# Altium PCB BAD.PcbDoc (part 1 of 2)
Units mil, origin at the board's own origin, x right, y up, seen from the top; angles counter-clockwise.
Board outline 1811.02 x 1811.02 mil, 4 copper layers (Top Layer, Int1 (GND), Int2, Bottom Layer), stack 53.912 mil thick; 65 components, 61 nets, 262 pads, 174 vias.
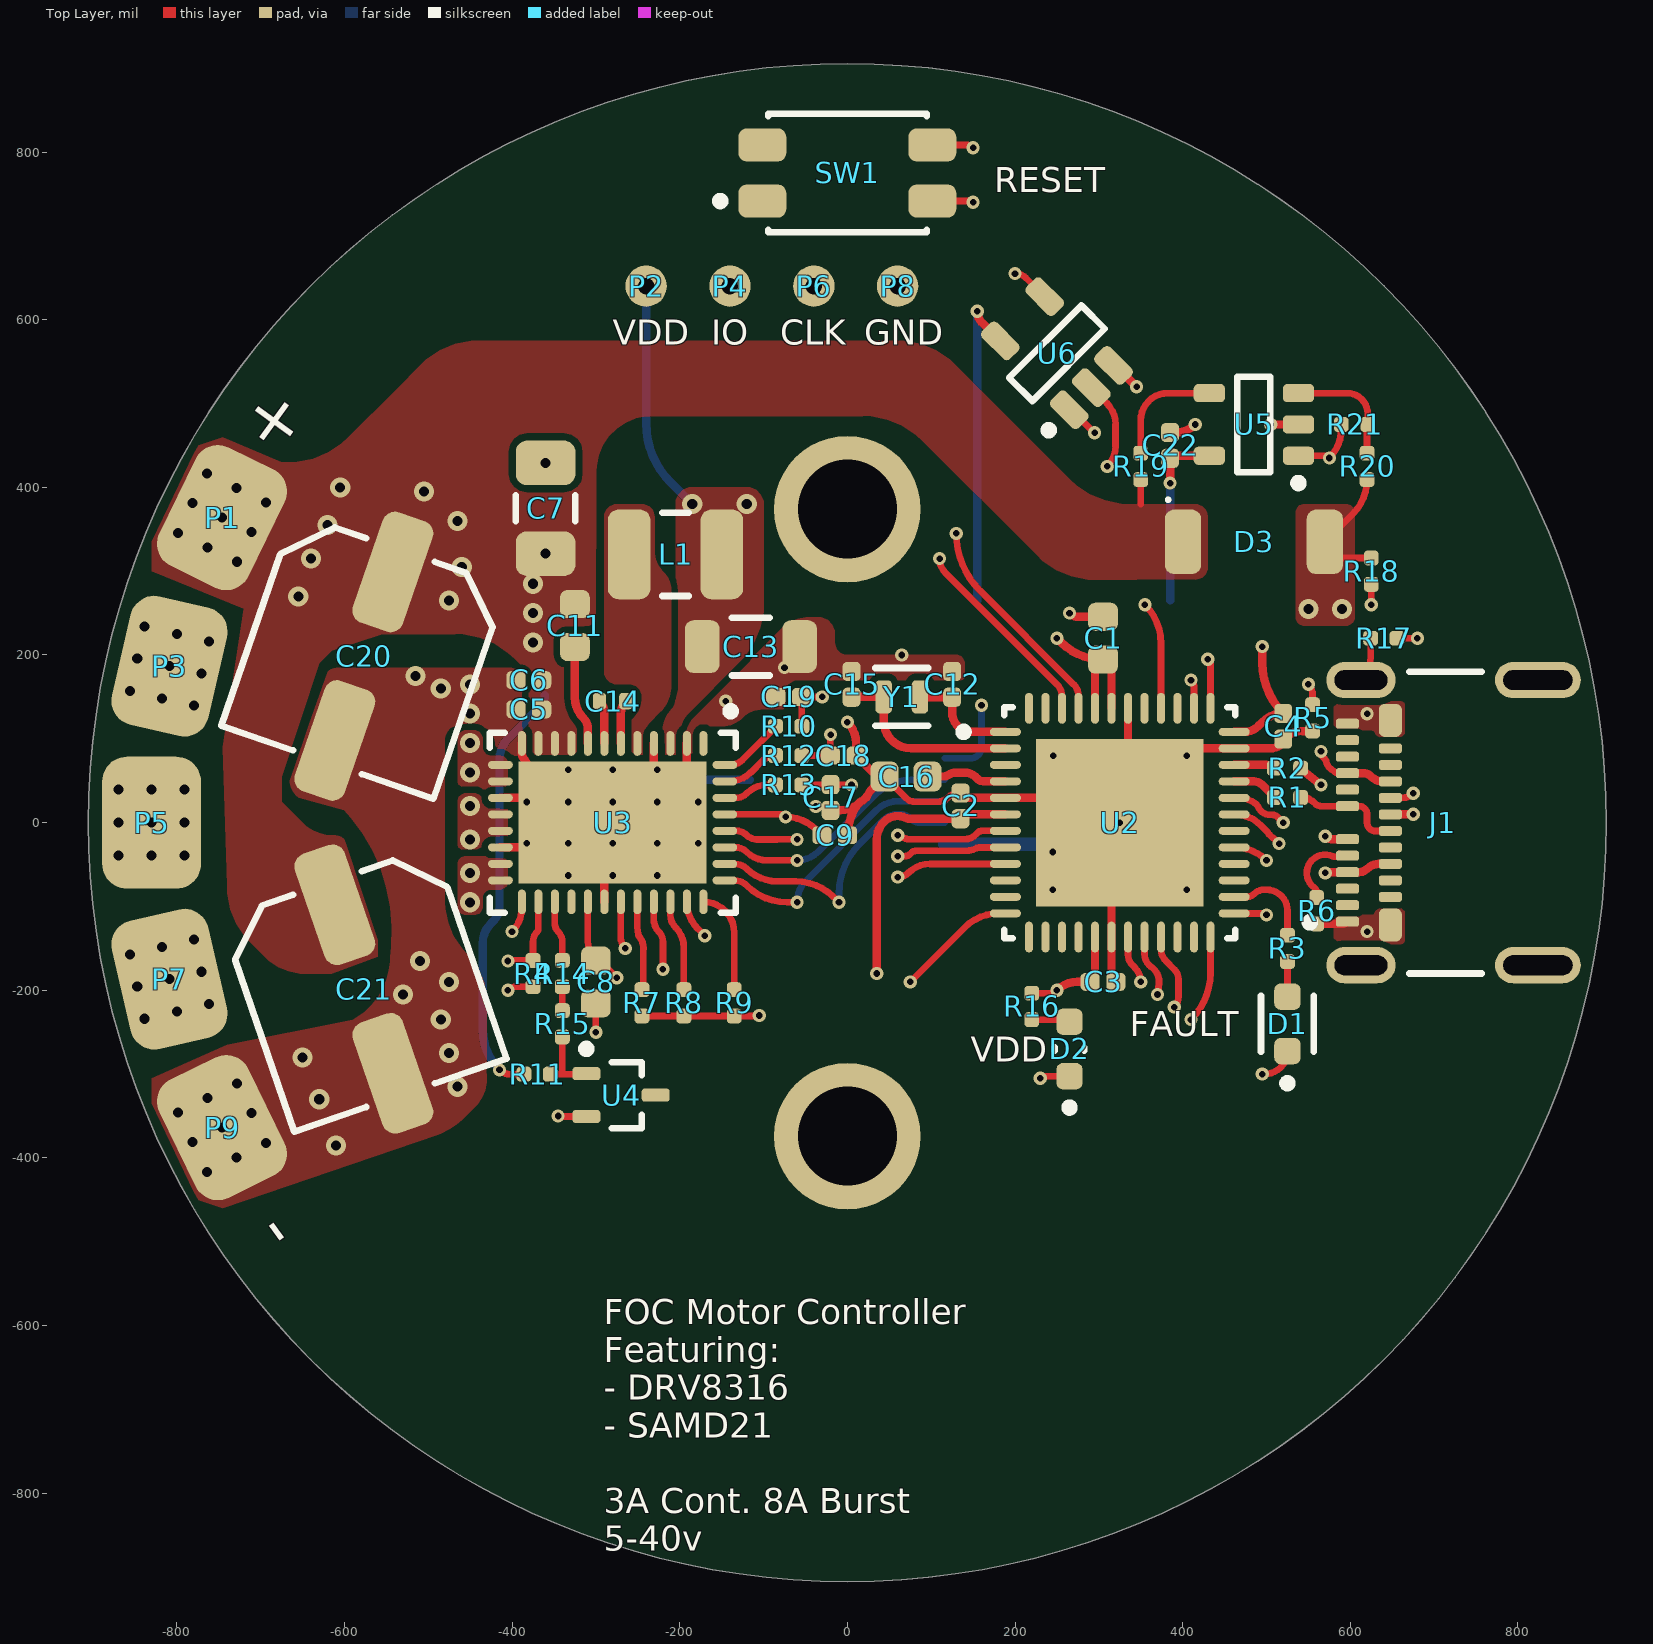
[diagram p0: Top Layer view]
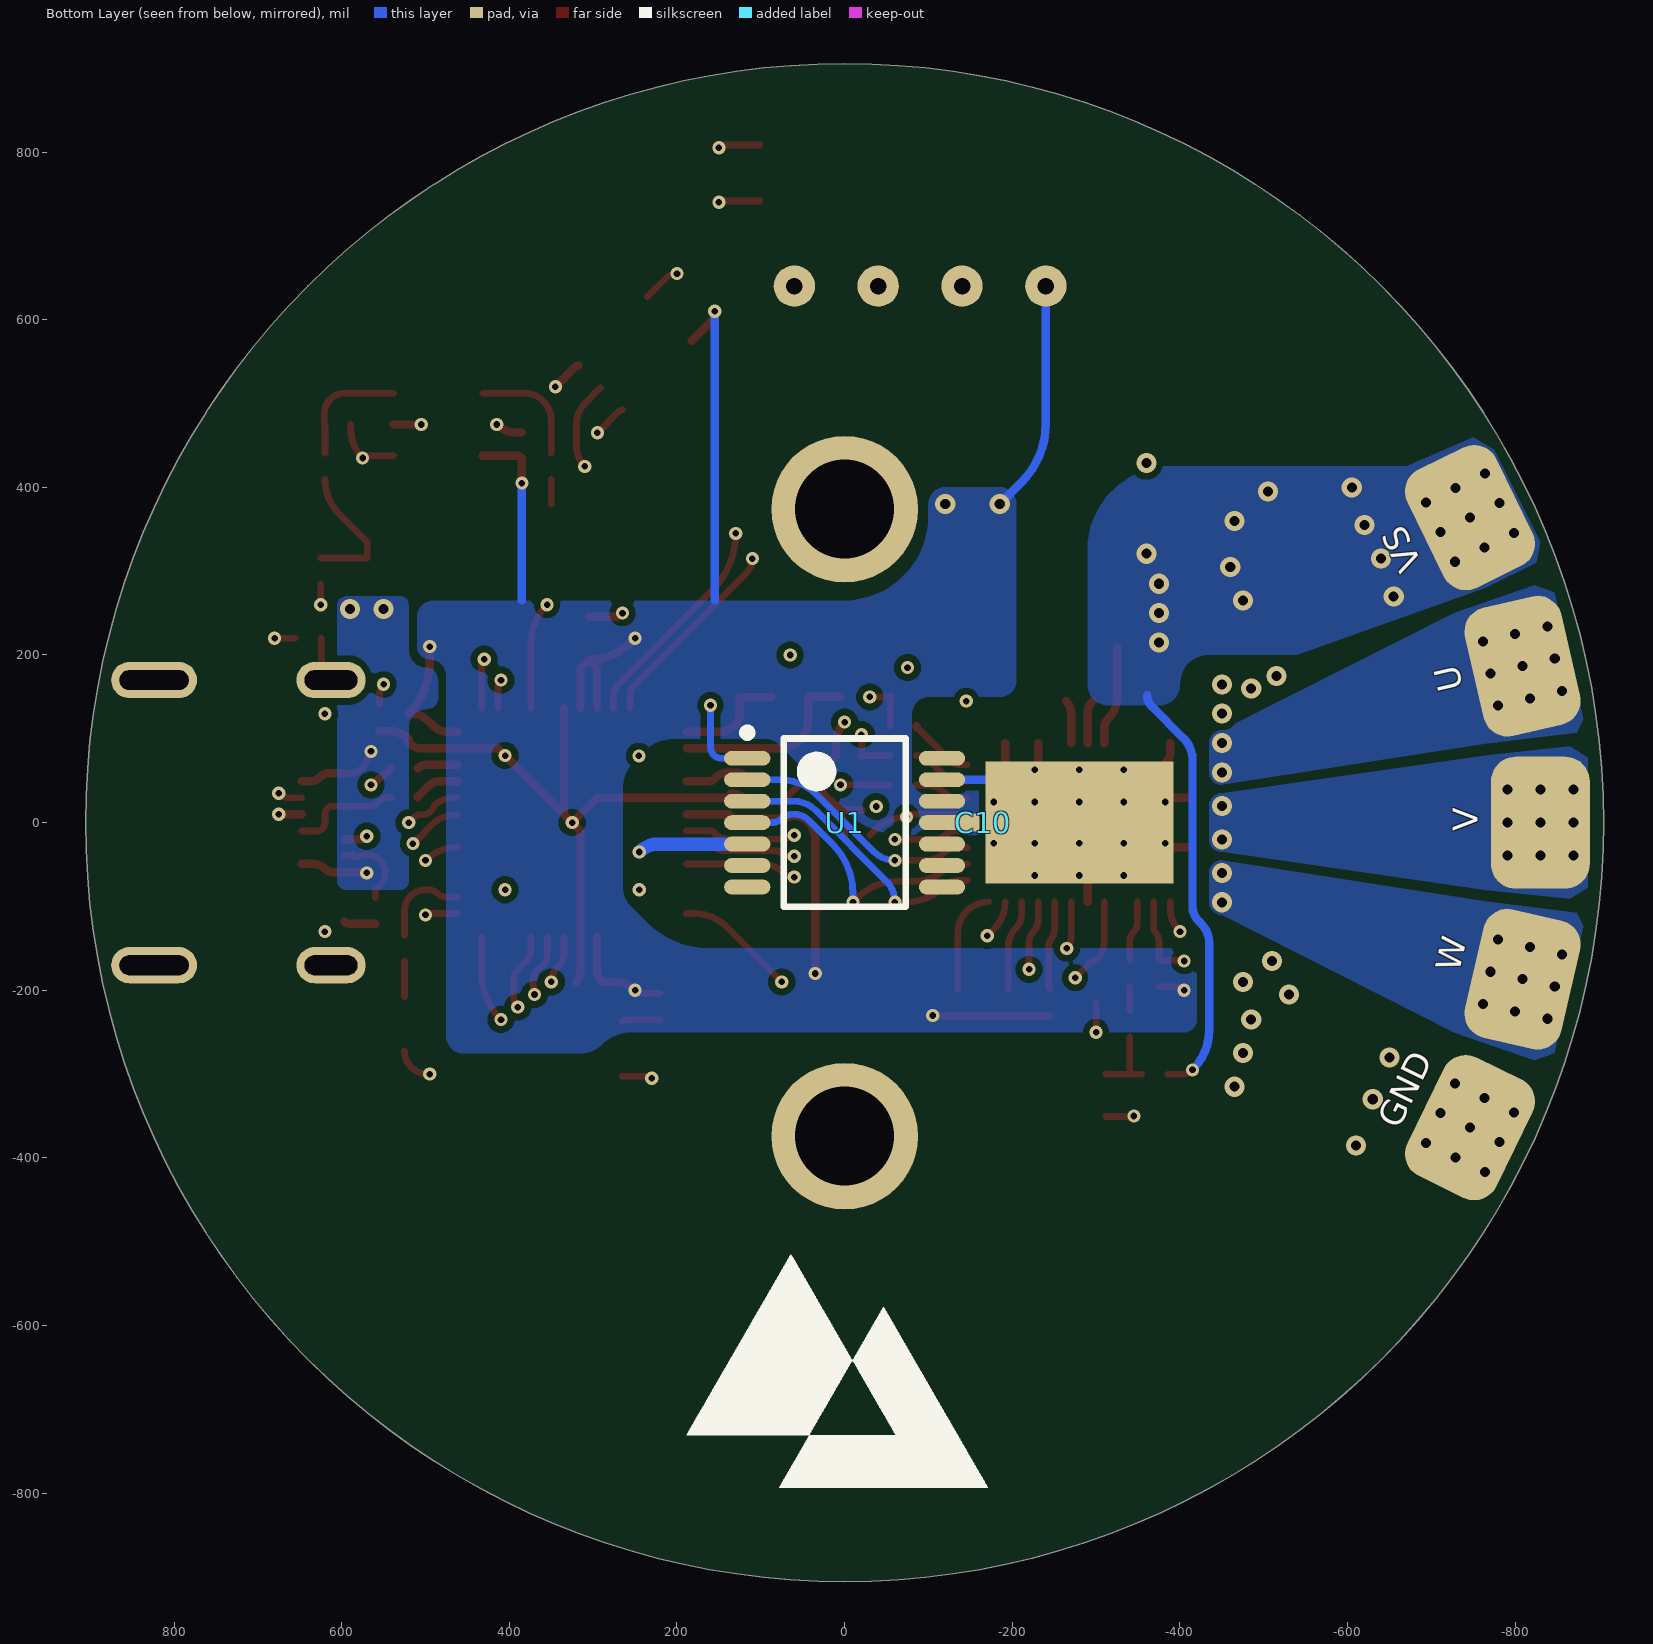
[diagram p1: Bottom Layer view, seen from below]
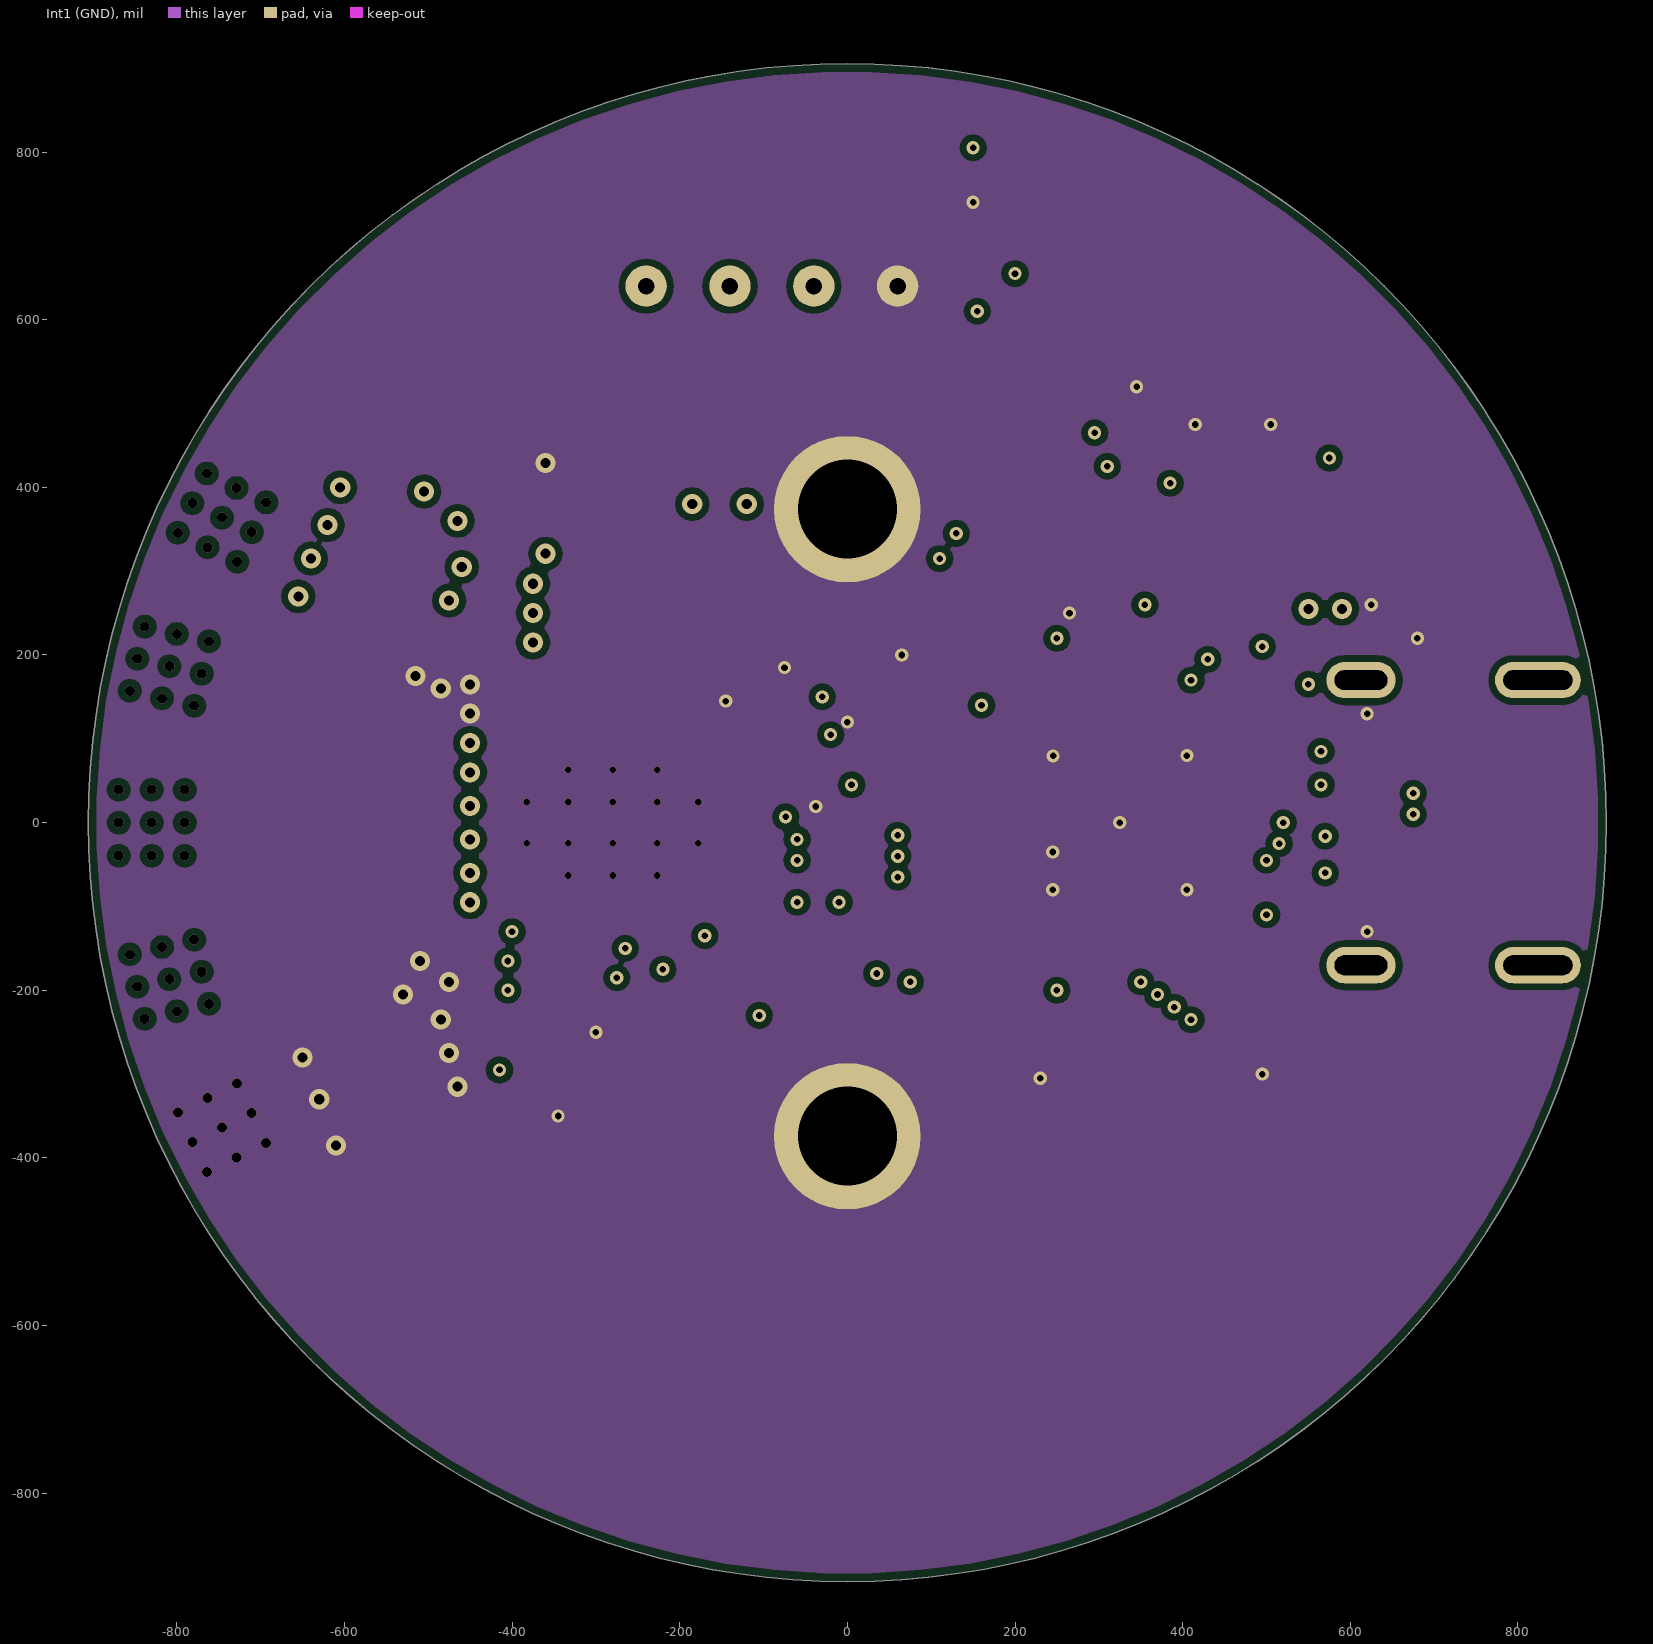
[diagram p2: Int1 (GND)]
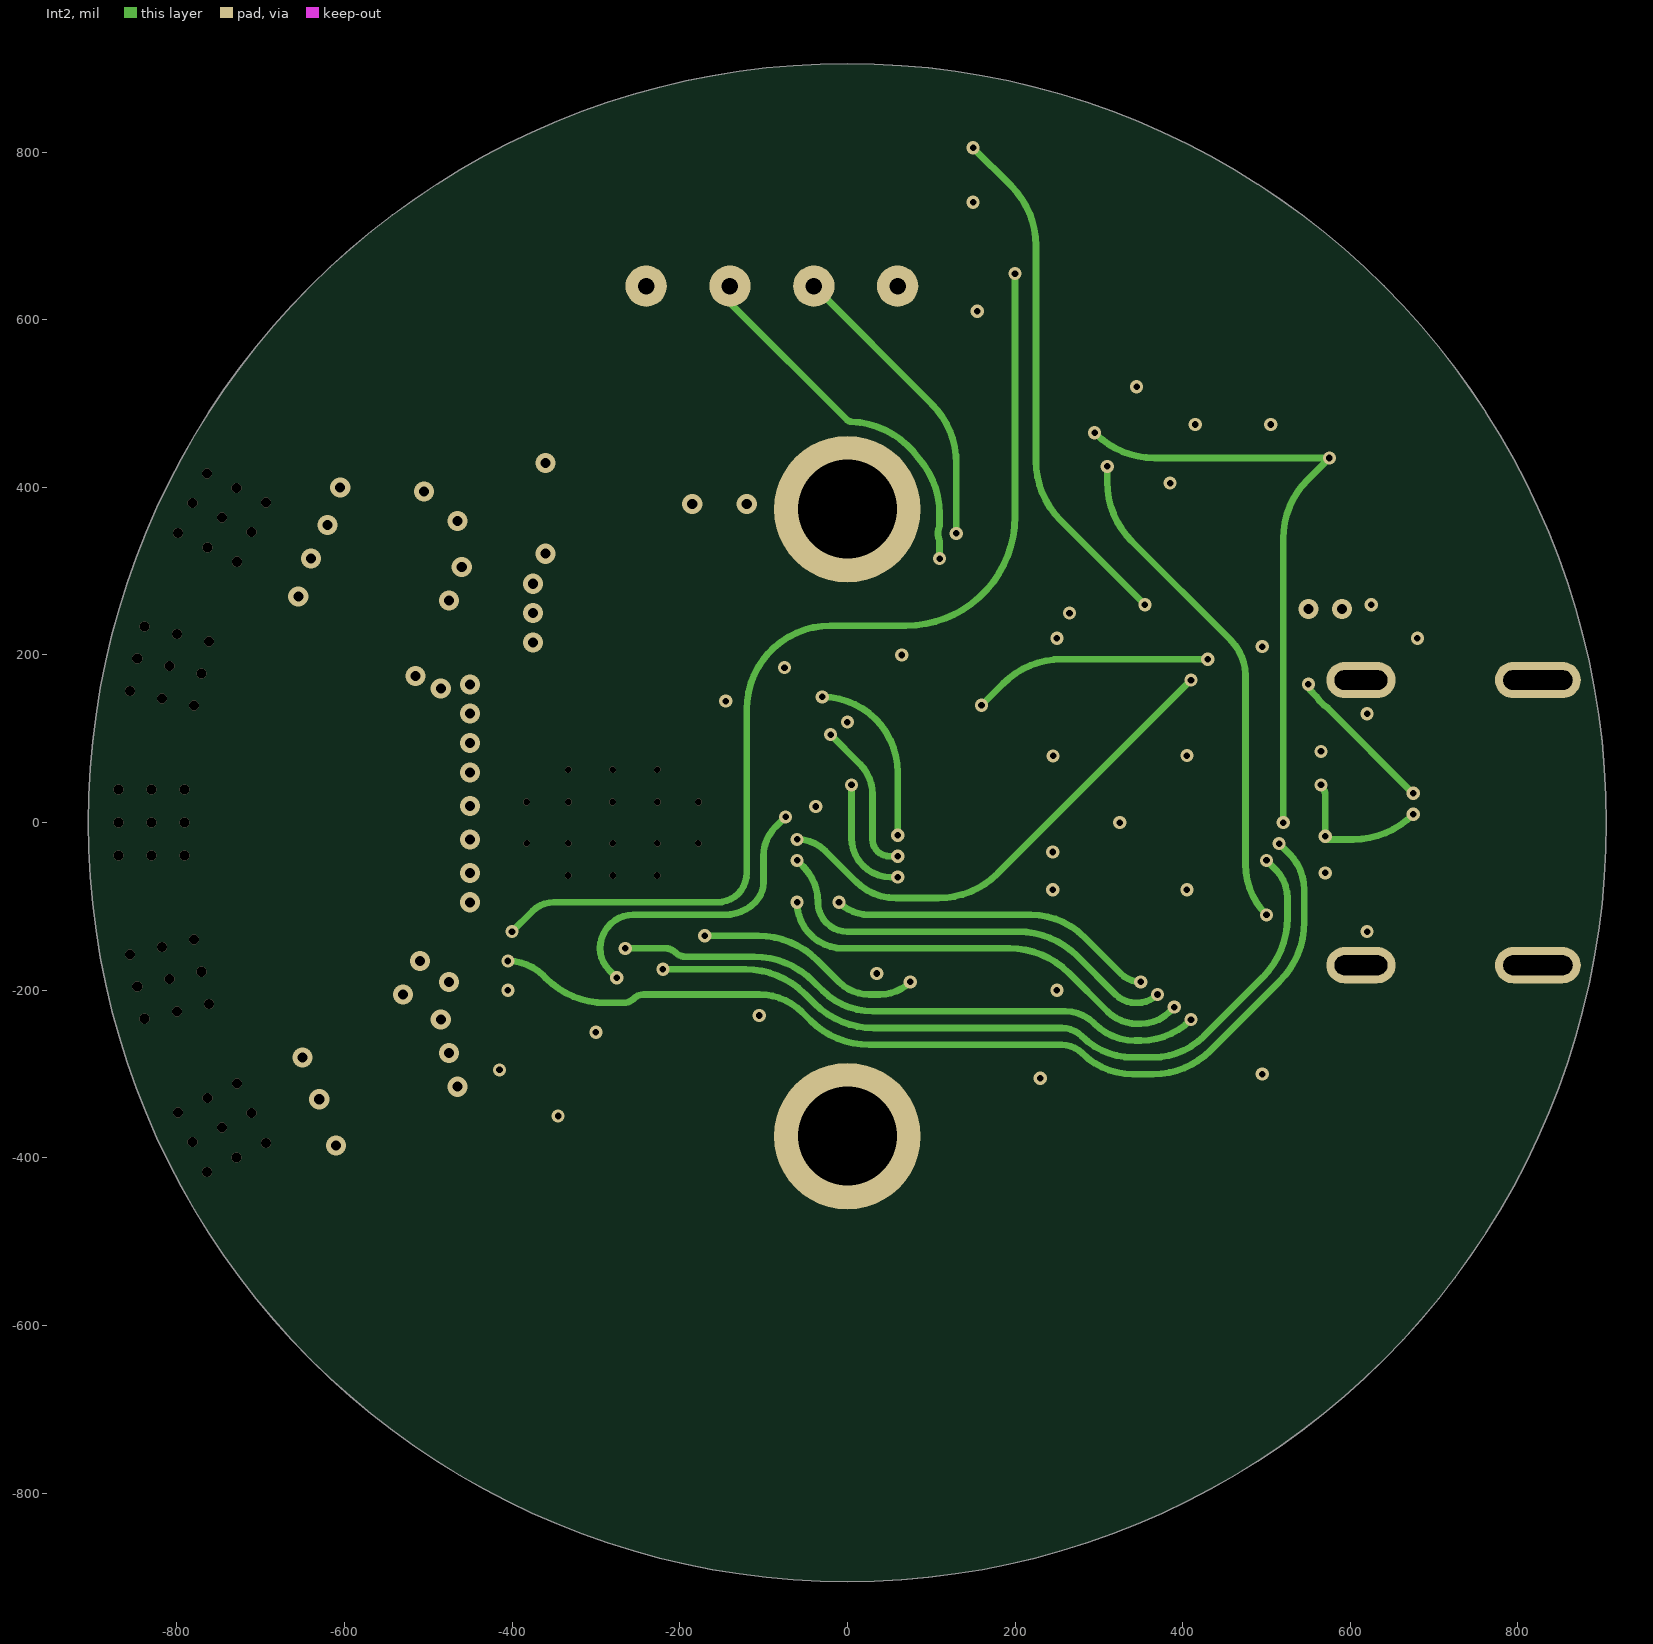
[diagram p3: Int2]
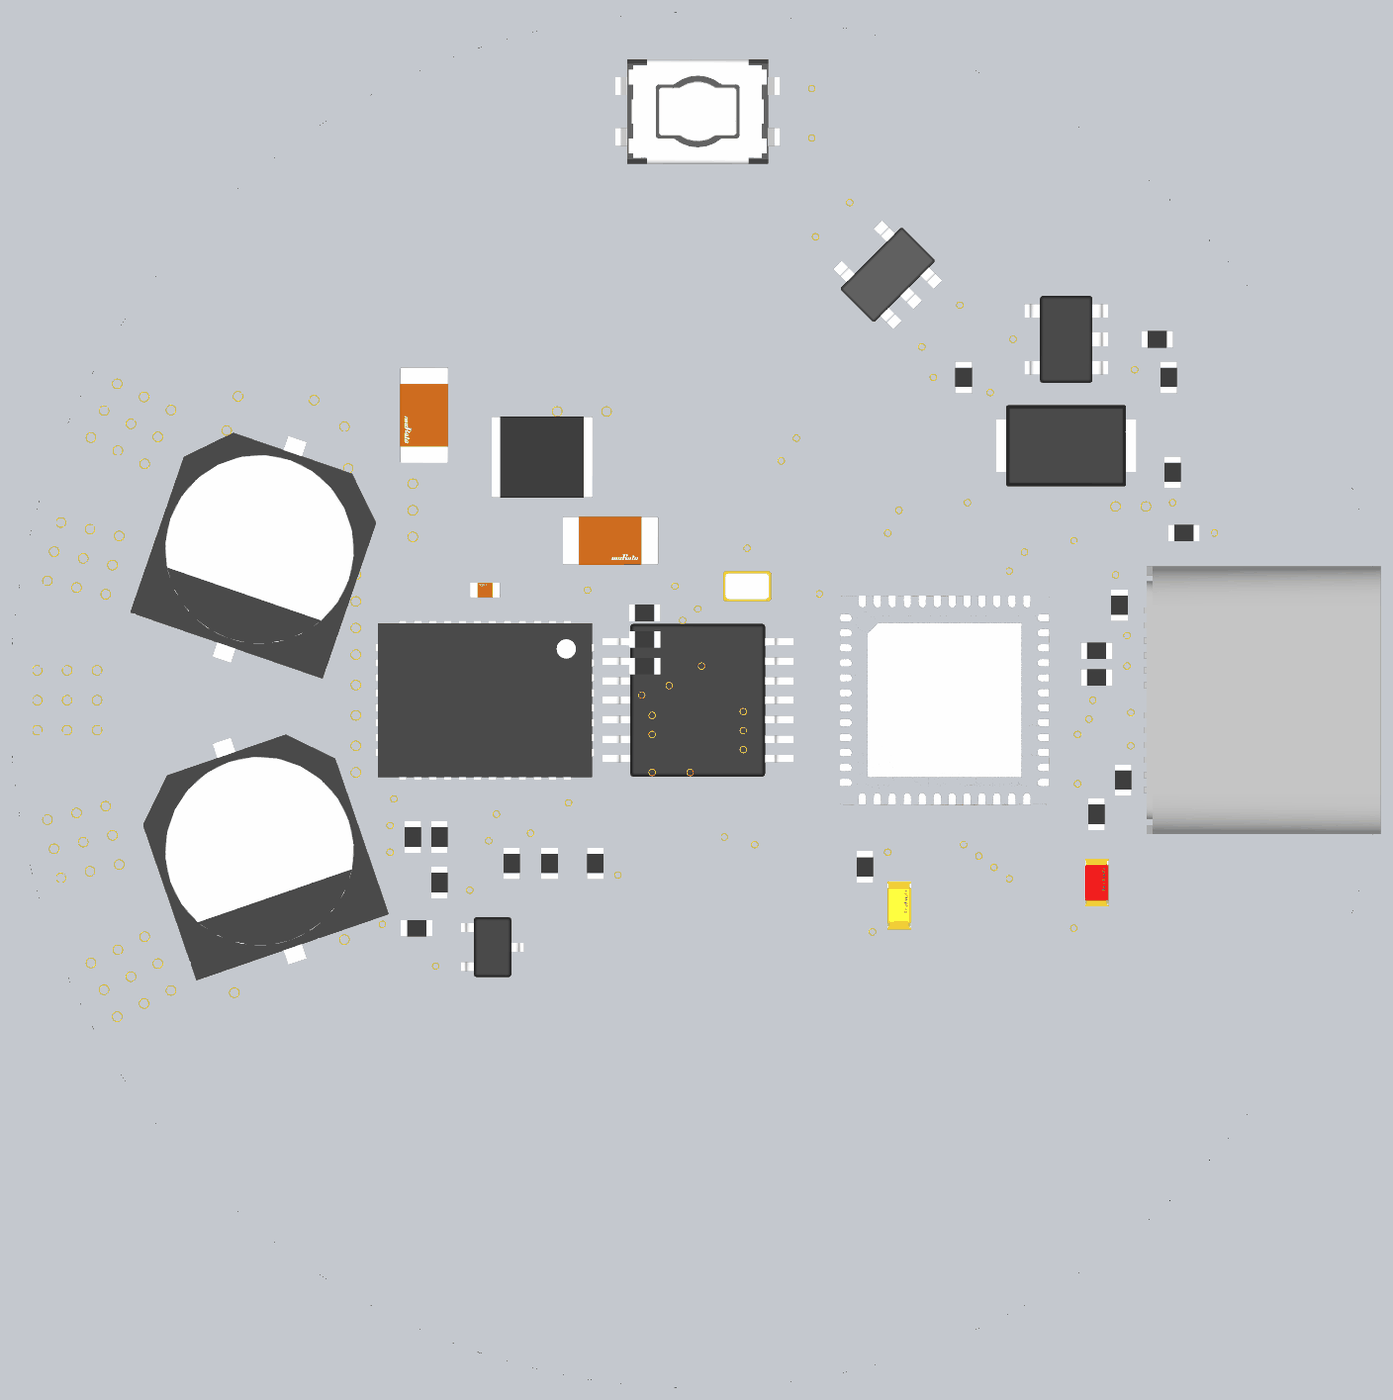
[diagram p5: 3D render of the assembled board from above, using the file's embedded part models]

## Layer stack, top to bottom
Top Solder: solder mask 1, SM-001, Dk 4
Top Layer: signal copper 1.378
Dielectric 1: prepreg 5.1, PP-017, Dk 4.3
Dielectric 2: prepreg 5.1, PP-017, Dk 4.3
Int1 (GND): signal copper 1.378
Dielectric 3: core 28, Core-039, Dk 4.8
Int2: signal copper 1.378
Dielectric 4: prepreg 5.1, PP-017, Dk 4.3
Dielectric 5: prepreg 5.1, PP-017, Dk 4.3
Bottom Layer: signal copper 1.378
Bottom Solder: solder mask 1, SM-001, Dk 4

## Board outline
-905.51,0 ccw(c0,0) 0,-905.51 ccw(c0,0) 905.51,0 ccw(c0,0) 0,905.51 ccw(c0,0)

## Design rules (kind name [scope] priority, off if disabled: settings)
BoardOutlineClearance [All] p1: gap=10 ignorepadtopadclearanceinfootprint=FALSE except(0: Arc-SplitContinuation Track-SplitContinuation SMDPad-SplitContinuation THPad-SplitContinuation Via-SplitContinuation Fill-SplitContinuation Poly-SplitContinuation Region-SplitContinuation Text-SplitContinuation)
Clearance [All] p1: gap=8 ignorepadtopadclearanceinfootprint=TRUE except(5: Arc-Arc Arc-Track Track-Track SMDPad-SMDPad; 7.87: Arc-SMDPad Track-SMDPad; 10: Arc-Via Track-Via; 12.99: Arc-THPad Track-THPad)
DiffPairsRouting [All] p1: maxlimit=10 minlimit=8 mostfreqgap=10 toplayer_minwidth=8 toplayer_maxwidth=16 toplayer_prefwidth=10 midlayer1_mingap=10 midlayer1_minwidth=15 midlayer1_maxwidth=15 midlayer1_prefwidth=15 midlayer2_mingap=10 midlayer2_minwidth=15 midlayer2_maxwidth=15 midlayer2_prefwidth=15 bottomlayer_minwidth=8 bottomlayer_maxwidth=16 bottomlayer_prefwidth=10 maxuncoupledlength=500
HoleSize [All] p1: absolutevalues=TRUE maxlimit=248 minlimit=8 maxpercent=80.000 minpercent=20.000
HoleToHoleClearance [All] p1: gap=20 allowstackedmicrovias=TRUE
MinimumAnnularRing [All] p1: minimumring=6
PolygonConnect [All] p1: connectstyle=Direct reliefconductorwidth=10 reliefentries=4 polygonreliefangle="90 Angle" airgapwidth=10
RoutingVias [All] p1: holewidth=28 width=50 viastyle="Through Hole" minholewidth=28 minwidth=50 maxholewidth=28 maxwidth=50
SilkToSolderMaskClearance [IsPad] p1: minsilkscreentomaskgap=6 clearancetoexposedcopper=TRUE
SolderMaskExpansion [All] p1: expansion=3 istentingtop=FALSE
Width [All] p1: maxlimit=30 minlimit=5 preferedwidth=10 midlayer1_maxwidth=10 midlayer2_maxwidth=10 minimp=50.000000 maximp=50.000000 favimp=50.000000
26 further rules are at their usual default settings.

## Classes and differential pairs
differential pair USB: +USB_P -USB_N

## Components (designator, comment, footprint, x,y, rotation, side; value= is the part's Value field where it differs from the comment)
C1 "1uF" 0603CAP 305,220 r270 top
C2 "100nF" 0402CAP 135,20 r270 top
C3 "100nF" 0402CAP 305,-190 r180 top
C4 "100nF" 0402CAP 520,115 r90 top
C5 "100nF" 0402CAP -380,135 r0 top
C6 "100nF" 0402CAP -380,170 r0 top
C7 "10uF" FP-GRT31C-0_2-IPC_B -360,375 r270 top
C8 "1uF" 0603CAP -300,-190 r90 top
C9 "100nF" 0402CAP -15,-15 r180 top
C10 "100nF" 0402CAP -165,0 r0 bottom
C11 "1uF" 0603CAP -325,235 r90 top
C12 "22pF" 0402CAP 125,165 r270 top
C13 "22uF" FP-GRM319-0_15-MFG -115,210 r0 top
C14 "47nF" FP-GRM155-0_05-MFG -280,145 r180 top
C15 "22pF" 0402CAP 5,165 r270 top
C16 "1uF" 0603CAP 70,55 r0 top
C17 "22pF" 0402CAP -20,30 r90 top
C18 "22pF" 0402CAP -5,80 r180 top
C19 "22pF" 0402CAP -70,150 r0 top
C20 "47 uF" CAPAE7866X61N -576.77,198.6 r251 top locked
C21 "47 uF" CAPAE7866X61N -576.77,-198.6 r289 top locked
C22 "100nF" 0402CAP 385,450 r270 top
D1 "Red" FP-APT1608LSECK-J3-PRV-MFG 525,-240 r90 top
D2 "Green" FP-APT1608MGC-MFG 265,-270 r90 top
D3 "PMEG40T20EPX" SODFL470X110-2N 485,335 r0 top
J1 "USB C" FP-1054500101-MFG 745,0 r90 top locked
L1 "47uH" INDC3225X25N -205,320 r180 top
P1 "Power Pad" "Power Pad" -746,363.85 r244 top
P2 "Small PTH Pad" "Small PTH Pad" -240,640 r0 top
P3 "Power Pad" "Power Pad" -808.73,186.71 r257 top
P4 "Small PTH Pad" "Small PTH Pad" -140,640 r0 top
P5 "Power Pad" "Power Pad" -830,0 r270 top
P6 "Small PTH Pad" "Small PTH Pad" -40,640 r0 top
P7 "Power Pad" "Power Pad" -808.73,-186.71 r283 top
P8 "Small PTH Pad" "Small PTH Pad" 60,640 r0 top
P9 "Power Pad" "Power Pad" -746,-363.85 r296 top
R1 "27" RESC1005X40X25LL05T05 525,30 r0 top
R2 "27" RESC1005X40X25LL05T05 525,65 r0 top
R3 "750" RESC1005X40X25LL05T05 525,-150 r270 top
R4 "5.1k" RESC1005X40X25LL05T05 -375,-180 r90 top
R5 "5.1k" RESC1005X40X25LL05T05 555,125 r270 top
R6 "5.1k" RESC1005X40X25LL05T05 560,-105 r270 top
R7 "5.1k" RESC1005X40X25LL05T05 -245,-215 r90 top
R8 "5.1k" RESC1005X40X25LL05T05 -195,-215 r90 top
R9 "5.1k" RESC1005X40X25LL05T05 -135,-215 r90 top
R10 "330" RESC1005X40X25LL05T05 -70,115 r0 top
R11 "2.7k" RESC1005X40X25LL05T05 -370,-300 r180 top
R12 "330" RESC1005X40X25LL05T05 -70,80 r0 top
R13 "330" RESC1005X40X25LL05T05 -70,45 r0 top
R14 "5.1k" RESC1005X40X25LL05T05 -340,-180 r270 top
R15 "5.1k" RESC1005X40X25LL05T05 -340,-240 r270 top
R16 "604" RESC1005X40X25LL05T05 220,-219.25 r90 top
R17 "100k" RESC1005X40X25LL05T05 640,220 r180 top
R18 "5.1k" RESC1005X40X25LL05T05 625,300 r90 top
R19 "5.1k" RESC1005X40X25LL05T05 350,425 r270 top
R20 "5.1k" RESC1005X40X25LL05T05 620,425 r270 top
R21 "100k" RESC1005X40X25LL05T05 605,475 r180 top
SW1 "EVQ-P2402M" EVQ-P2402M 0,775 r90 top
U1 "AS5047D-ATSM" TSOP65P640X120-14N 0,0 r180 bottom locked
U2 "ATSAMD21G18A-MF" QFN-48 325,0 r0 top locked
U3 "DRV8316" QFN50P500X700X100_HS-41L -280,0 r270 top locked
U4 "LM4040D33FTA" SOT65P210X100-3N -270,-325 r0 top
U5 "LT1716CS5#TRMPBF" SOT95P280X100-5N 485,475 r180 top
U6 "OR" DBV0005A_M 250,560 r135 top
Y1 "32.768 kHz" ABS05W-32.768KHZ-D-2-T 65,150 r0 top

## Footprints (in the part's own frame and the unit in brackets; to place one, negate y for a bottom-side part, rotate by r counter-clockwise, add the part's x,y. Pads: shape width x height; smd on the part's side, far side on the other; paste and mask are expansions set on the pad)
0402CAP [mm] "0402 Capacitor"
  rrect50% 0.58x0.54 smd: 1(-0.39,0) 2(0.39,0)
  body extent -0.55,-0.3 0.55,0.3, height 0.56
0603CAP [mm] "0603 Capacitor"
  rrect50% 0.85x0.9 smd: 1(-0.65,0) 2(0.65,0)
  body extent -0.88,-0.48 0.87,0.48, height 0.9
ABS05W-32.768KHZ-D-2-T [mm]
  rrect50% 0.5x1 smd paste+0: 1(-0.55,0) 2(0.55,0)
  silkscreen extent -0.8,-0.87 0.8,0.87, body extent -0.95,-0.65 0.95,0.65, height 0.25
CAPAE7866X61N [mm] "Aluminum Electrolytic Capacitor, Body 6.60x6.60x6.10mm, IPC Medium Density"
  rrect50% 3.55x1.6 smd: 1(-2.7,0) 2(2.7,0)
  silkscreen extent -3.4,-3.4 3.4,3.4, body extent -3.9,-3.4 3.9,3.4, height 6.1
DBV0005A_M [mm] "SOT23, 5-Leads, Body 3.05x1.75mm, Pitch 0.95mm, IPC Low Density"
  rrect50% 1.2x0.65 smd: 1(-1.475,0.95) 2(-1.475,0) 3(-1.475,-0.95) 4(1.475,-0.95) 5(1.475,0.95)
  silkscreen extent -1.6,-1.55 0.5,1.95, body extent -1.42,-1.46 1.42,1.46, height 1.08
EVQ-P2402M [mm] "Tactile Switch"
  rrect50% 1x1.45 smd paste+0: 1(-0.85,2.575) 2(0.85,2.575) 3(-0.85,-2.575) 4(0.85,-2.575)
  silkscreen extent -1.8,-2.4 1.8,3.97, body extent -1.9,-3.4 1.9,3.4, height 0.25
FP-1054500101-MFG [mm]
  rrect100% 1.1x2.1 hole 1.6 slot 0.6 at 0 deg paste-1000 mask+0: 1(-4.32,3.36) 2(4.32,3.36)
  rrect100% 1.1x2.6 hole 2.1 slot 0.6 at 0 deg paste-1000 mask+0: 3(-4.32,-2) 4(4.32,-2)
  rrect50% 0.3x0.7 smd paste-0.05 mask+0: A1(-3,3.77) A2(-2.5,3.77) A3(-2,3.77) A4(-1.5,3.77) A5(-1,3.77) A6(-0.5,3.77) A7(0.5,3.77) A8(1,3.77) A9(1.5,3.77) A10(2,3.77) A11(2.5,3.77) A12(3,3.77) B2(2.25,2.47) B3(1.75,2.47) B4(1.25,2.47) B5(0.75,2.47) B6(0.25,2.47) B7(-0.25,2.47) B8(-0.75,2.47) B9(-1.25,2.47) B10(-1.75,2.47) B11(-2.25,2.47)
  rrect50% 1x0.7 smd paste-0.05 mask+0: B1(3.1,2.47) B12(-3.1,2.47)
  silkscreen extent -4.57,-0.3 4.57,5.03, body extent -4.47,-3.9 4.47,4, height 3.23
FP-APT1608LSECK-J3-PRV-MFG [mm]
  rrect50% 0.8x0.8 smd paste+0: 1(-0.825,0) 2(0.825,0)
  silkscreen extent -1.92,-0.8 0.85,0.8, body extent -1.33,-0.55 1.33,0.55, height 0.25
FP-APT1608MGC-MFG [mm]
  rrect50% 0.8x0.8 smd paste+0 mask+0: 1(-0.825,0) 2(0.825,0)
  silkscreen extent -1.9,-0.45 0.05,0.45, body extent -1.33,-0.55 1.33,0.55, height 0.25
FP-GRM155-0_05-MFG [mm]
  rrect50% 0.4x0.5 smd paste+0 mask+0: 1(-0.4,0) 2(0.4,0)
  body extent -0.7,-0.38 0.7,0.38, height 0.25
FP-GRM319-0_15-MFG [mm]
  rrect50% 1.05x1.6 smd paste+0 mask+0: 1(-1.475,0) 2(1.475,0)
  silkscreen extent -0.58,-0.87 0.58,0.87, body extent -2.1,-0.97 2.1,0.97, height 0.25
FP-GRT31C-0_2-IPC_B [mil]
  rrect50% 53.33x71.11 smd paste+0 mask+0: 1(-54.16,0) 2(54.16,0)
  silkscreen extent -16,-36 16,36, body extent -91,-45 91,45, height 10
INDC3225X25N [mm] "Chip Inductor, 2-Leads, Body 3.20x2.50mm, IPC Medium Density"
  rrect50% 1.29x2.72 smd: 1(-1.405,0) 2(1.405,0)
  silkscreen extent -0.4,-1.26 0.4,1.26, body extent -1.7,-1.35 1.7,1.35, height 2.5
"Power Pad" [mm]
  rrect50% 4x3 smd: 1(0,0)
  rrect50% 4x3 smd far side: 1(0,0)
QFN50P500X700X100_HS-41L [mm] "QFN, 40-Leads, Body 5.00x7.00mm, Pitch 0.50mm, Thermal Pad 3.70x5.70mm, IPC High Density"
  oval 0.75x0.25 smd paste-0.05 mask+0.07: 1(-2.4,2.75) 2(-2.4,2.25) 3(-2.4,1.75) 4(-2.4,1.25) 5(-2.4,0.75) 6(-2.4,0.25) 7(-2.4,-0.25) 8(-2.4,-0.75) 9(-2.4,-1.25) 10(-2.4,-1.75) 11(-2.4,-2.25) 12(-2.4,-2.75) 21(2.4,-2.75) 22(2.4,-2.25) 23(2.4,-1.75) 24(2.4,-1.25) 25(2.4,-0.75) 26(2.4,-0.25) 27(2.4,0.25) 28(2.4,0.75) 29(2.4,1.25) 30(2.4,1.75) 31(2.4,2.25) 32(2.4,2.75)
  oval 0.25x0.75 smd paste-0.05 mask+0.07: 13(-1.75,-3.4) 14(-1.25,-3.4) 15(-0.75,-3.4) 16(-0.25,-3.4) 17(0.25,-3.4) 18(0.75,-3.4) 19(1.25,-3.4) 20(1.75,-3.4) 33(1.75,3.4) 34(1.25,3.4) 35(0.75,3.4) 36(0.25,3.4) 37(-0.25,3.4) 38(-0.75,3.4) 39(-1.25,3.4) 40(-1.75,3.4)
  rect 3.7x5.7 smd paste-2.85 mask+0.07: 41(0,0)
  rect 3.7x5.7 smd far side paste-2.85 mask+0.102: 42(0,0)
  silkscreen extent -3.5,-3.72 2.73,3.73, body extent -2.66,-3.65 2.66,3.65, height 1
QFN-48 [mm] "ATSAMD21G18A-M Footprint"
  oval 0.94x0.239 smd paste-0.051: 1(-3.465,2.75) 2(-3.465,2.25) 3(-3.465,1.75) 4(-3.465,1.25) 5(-3.465,0.75) 6(-3.465,0.25) 7(-3.465,-0.25) 8(-3.465,-0.75) 9(-3.465,-1.25) 10(-3.465,-1.75) 11(-3.465,-2.25) 12(-3.465,-2.75) 25(3.466,-2.75) 26(3.466,-2.25) 27(3.466,-1.75) 28(3.466,-1.25) 29(3.466,-0.75) 30(3.466,-0.25) 31(3.466,0.25) 32(3.466,0.75) 33(3.466,1.25) 34(3.466,1.75) 35(3.466,2.25) 36(3.466,2.75)
  oval 0.239x0.94 smd paste-0.051: 13(-2.75,-3.465) 14(-2.25,-3.465) 15(-1.75,-3.465) 16(-1.25,-3.465) 17(-0.75,-3.465) 18(-0.25,-3.465) 19(0.25,-3.465) 20(0.75,-3.465) 21(1.25,-3.465) 22(1.75,-3.465) 23(2.25,-3.465) 24(2.75,-3.465) 37(2.75,3.466) 38(2.25,3.466) 39(1.75,3.466) 40(1.25,3.466) 41(0.75,3.466) 42(0.25,3.466) 43(-0.25,3.466) 44(-0.75,3.466) 45(-1.25,3.466) 46(-1.75,3.466) 47(-2.25,3.466) 48(-2.75,3.466)
  rect 5.08x5.08 smd paste-1000: 49(0,0)
  silkscreen extent -4.86,-3.5 3.5,3.5, body extent -4.44,-4.44 4.44,4.44, height 0.25
RESC1005X40X25LL05T05 [mm] "Chip Resistor, 2-Leads, Body 1.05x0.55mm, IPC High Density"
  rrect50% 0.45x0.45 smd: 1(-0.4,0) 2(0.4,0)
  body extent -0.53,-0.28 0.53,0.28, height 0.4
"Small PTH Pad" [mm]
  round 1.25 hole 0.5: 1(0,0)
SODFL470X110-2N [mm] "SODFL, 2-Leads, Body 2.50x4.70mm, IPC Medium Density"
  rrect50% 1.1x1.95 smd: 1(-2.15,0) 2(2.15,0)
  silkscreen extent -2.65,1.23 -2.55,1.32, body extent -2.35,-1.35 2.35,1.35, height 1.1
SOT65P210X100-3N [mm] "SOT23, 3-Leads, Body 2.00x2.10mm, Pitch 0.65mm, IPC Medium Density"
  rrect50% 0.85x0.4 smd: 1(-1.05,0.65) 2(-1.05,-0.65) 3(1.05,0)
  silkscreen extent -1.17,-1 0.63,1.52, body extent -1.05,-1 1.05,1, height 1
SOT95P280X100-5N [mm] "SOT23, 5-Leads, Body 2.90x2.80mm, Pitch 0.95mm, IPC Medium Density"
  rrect50% 0.95x0.55 smd: 1(-1.35,0.95) 2(-1.35,0) 3(-1.35,-0.95) 4(1.35,-0.95) 5(1.35,0.95)
  silkscreen extent -1.48,-1.45 0.5,1.9, body extent -1.4,-1.45 1.4,1.45, height 1
TSOP65P640X120-14N [mm] "TSOP, 14-Leads, Body 5.00x4.40mm, Pitch 0.65mm, IPC Medium Density"
  oval 1.4x0.45 smd: 1(-2.95,1.95) 2(-2.95,1.3) 3(-2.95,0.65) 4(-2.95,0) 5(-2.95,-0.65) 6(-2.95,-1.3) 7(-2.95,-1.95) 8(2.95,-1.95) 9(2.95,-1.3) 10(2.95,-0.65) 11(2.95,0) 12(2.95,0.65) 13(2.95,1.3) 14(2.95,1.95)
  silkscreen extent -3.08,-2.55 1.85,2.85, body extent -3.2,-2.55 3.2,2.55, height 1.2

## Part data
C1 C8 C11 C16: library part GRT188R61H105ME13D, Supplier Part Number 1=490-12331-1-ND, Supplier 1=Digi-Key
C2 C3 C4 C5 C6 C9 C10 C22: library part GCM155R71H104KE02D, Supplier Part Number 1=490-10672-1-ND, Supplier 1=Digi-Key
C7: library part GRT31CR61H106ME01L, Supplier Part Number 1=490-12457-1-ND, Supplier 1=Digi-Key
C12 C15 C17 C18 C19: library part C0402C220J5GAC7411, Supplier Part Number 1=399-C0402C220J5GAC7411CT-ND, Supplier 1=Digi-Key
C13: library part GRM319R61C226ME15D, "Multilayer Ceramic Capacitors 22uF ±10% 16V X7R SMD 1210", Case Code (Imperial)=1210, Case Code (Metric)=3225, Dielectric=X7R, Dielectric Material=Ceramic, Max Operating Temperature=125°C, Min Operating Temperature=-55°C, Package Quantity=1, Supplier Part Number 1=490-12763-1-ND, Tolerance=10%, Voltage=16V, Capacitance=22uF, Case/Package=1210, Construction=Flat, Depth=2.5mm, Height=2.5mm, Lead Free="Lead Free", Length=3.2mm, Mount="Surface Mount", Number of Pins=2, Packaging="Tape and Reel", Radiation Hardening=No, REACH SVHC="No SVHC", Resistor Type=Ceramic, RoHS Compliant=Yes, Series=C, Supplier 1=Digi-Key, Termination=SMD/SMT, Thickness=0.11inch, Voltage Rating=16V, Voltage Rating (DC)=16V, Weight=0.000564oz, Width=0.098inch
C14: library part C1005X7R1H473K050BB, "Chip Capacitor, 47 nF, +/- 10%, 50 V, -55 to 125 degC, 0402 (1005 Metric), RoHS, Tape and Reel", Capacitance=0.047µF, Manufacturer=TDK, Operating Temperature=-55°C~125°C, Package / Case=0402(1005Metric), Package Description="2-Pin Surface Mount Device, Body 1 x 0.5 mm", Package Reference=1005, PCN Part Number=MLCCPartNumberChange30/Nov/2012, Ratings=-, Standard Package=1, Supplier Part Number 1=490-10702-1-ND, Temperature Coefficient=X7R, Tolerance=±10%, Voltage - Rated=50V, Applications=GeneralPurpose, Category=Capacitors, Datasheet URL=https://product.tdk.com/info/en/catalog/datasheets/mlcc_commercial_general_en.pdf, Datasheet Version=08/2016, Family=CeramicCapacitors, Features=-, Height - Seated (Max)=-, Kits=445-9021-KIT-ND-KITMLCC100PF-10UF04026.3-50V445-173086-KIT-ND-C0402-2220X7R6.3-50V1,000PF-, Lead Spacing=-, Lead Style=-, Manufacturer URL=http://www.tdk.com/, Mounting Technology=SurfaceMount, Mounting Type=SurfaceMount,MLCC, Online Catalog=CSeries,GeneralPurpose, Other Names=445-7336-1, Packaging=CutTape(CT), Product Training Modules=CSeriesGeneralApplicationsSEAT,CCV,andTVCLDesignToolsGuidetoReplacinganElectrolyticCapacitorwithanMLCC, RoHS Information=RoHSCertificate-MLCC, Series=C, Size / Dimension="0.039\"Lx0.020\"W(1.00mmx0.50mm)", Supplier 1=Digi-Key, Thickness (Max)="0.022\"(0.55mm)"
C20 C21: library part EEE-FT1H470AL, Supplier Part Number 1=10-EEE-FT1H470ALCT-ND, Supplier 1=Digi-Key
D1: library part APT1608LSECK/J3-PRV, "LED RED CLEAR 2SMD", Case Code (Imperial)=0603, Case Code (Metric)=1608, Forward Voltage=1.8V, Lens Color=Colorless, Supplier Part Number 1=754-1930-1-ND, Test Current=2mA, Case/Package=0603, Color=Red, Dominant Wavelength=625nm, Height=0.75mm, Length=1.6mm, Lens Transparency=Clear, Luminous Intensity=40mcd, Mount="Surface Mount", Packaging="Tape and Reel", Supplier 1=Digi-Key, Viewing Angle=120°, Width=0.8mm
D2: library part APT1608MGC, "LED GREEN CLEAR CHIP SMD", Case Code (Imperial)=0603, Case Code (Metric)=1608, Forward Current=20mA, Forward Voltage=2.1V, Lens Color=Clear, Max Operating Temperature=85°C, Min Operating Temperature=-40°C, Package Quantity=2000, Supplier Part Number 1=754-1118-1-ND, Case/Package=0603, Color=Green, Dominant Wavelength=570nm, Height=0.75mm, Illumination Color=Green, Lead Free="Lead Free", Length=1.6mm, Lens Style=Clear, Luminous Intensity=70mcd, Mount="Surface Mount", Packaging="Tape and Reel", Supplier 1=Digi-Key, Test Current=20mA, Viewing Angle=120°, Width=0.8mm
D3: Supplier Part Number 1=1727-7480-1-ND, Supplier 1=Digi-Key
J1: library part 1054500101, "CONN RCP USB3.1 TYPEC 24P SMD RA", Current Rating=0.25/1.25/5A, Manufacturer=Molex, Package=0, Supplier Part Number 1=WM12856CT-ND, Temperature="-30°C to +85°C", Temperature Range High=+85°C, Temperature Range Low=-30°C, Voltage Rating=30V, Automotive=No, Category=Conn, ComponentLink2Description=Datasheet, ComponentLink2URL=https://www.molex.com/webdocs/datasheets/pdf/en-us/1054500101_IO_CONNECTORS.pdf, Conn Orientation="Right Angle", Contact Material=Gold,Nickel, Device Class L1=Connectors, Device Class L2="USB Connectors", Device Class L3=unset, Digikey Description="CONN RCP USB3.1 TYPEC 24P SMD RA", Footprint Url=https://www.molex.com/pdm_docs/sd/1054500101_sd.pdf, Height=3.44mm, Is Female=yes, Lead Free=Yes, Manufacturer Part Number=1054500101, Mouser Description="USB Shielded I/O Receptacle; Type C; Right Angle; Surface Mount; Gold over Nickel", Number of Contacts=24, Octopart=https://octopart.com/105450-0101-molex-68082325, Pitch=0.5mm, RoHS=TRUE, Shielding=true, Supplier 1=Digi-Key, Usb Standard="USB 3.1"
L1: library part L1210R470KDWIT, Supplier Part Number 1=50AC9370, Supplier 1=Newark
R1 R2: library part ERJ2RKD27R0X, Supplier Part Number 1=8072299, Supplier 1=RSComponents
R3: library part ERJ-2RKF7500X, Supplier Part Number 1=P750LCT-ND, Supplier 1=Digi-Key
R4 R5 R6 R7 R8 R9 R14 R15 R18 R19 R20: library part ERJ-2RKF5101X, "PANASONIC - ERJ2RKF5101X - SMD Chip Resistor, 0402 [1005 Metric], 5.1 kohm, ERJ2R Series, 50 V, Thick Film, 100 mW", Case Code (Imperial)=0402, Case Code (Metric)=1005, Max Operating Temperature="155 degC", Min Operating Temperature="-55 degC", Package Quantity=1, PartNumber=ERJ-2RKF4701X, Power Rating="100 mW", Resistance="4.7 KOhm", Supplier Part Number 1=P5.10KLCT-ND, Tolerance=1%, Voltage Rating="50 V", Case\/Package=0402, ComponentLink1Description="Manufacturer URL", ComponentLink1URL=http://www.panasonic.com/, ComponentLink2Description=Datasheet, ComponentLink2URL=http://industrial.panasonic.com/cdbs/www-data/pdf/RDA0000/AOA0000C86.pdf, DatasheetVersion=04/2015, Height="0.35 mm", Length="1 mm", Mount="Surface Mount", Mounting Technology="Surface Mount", PackageDescription="2-Pin Surface Mount Device, Body 1 x 0.5 mm", PackageReference=0402, Packaging="Cut Tape", Pins=2, Radiation Hardening=No, REACH SVHC=Yes, RoHSCompliant=true, Supplier 1=Digi-Key, Width="0.5 mm"
R10 R12 R13: library part ERJ2RKF3300X, Manufacturer=Panasonic, Part Number=ERJ2RKF3300X
R11: library part ERJ2RKF2701X, Manufacturer=Panasonic, Part Number=ERJ2RKF2701X, Supplier 1=Digi-Key
R16: library part ERJ-2RKF6040X, Manufacturer=Panasonic, Supplier Part Number 1=P604LCT-ND, Part Number=ERJ-2RKF6040X, Supplier 1=Digi-Key
R17 R21: library part ERJ2RHD1003X, Supplier Part Number 1=85Y7989, Supplier 1=Newark
SW1: Supplier Part Number 1=P11080SCT-ND, Supplier 1=Digi-Key
U1: Supplier Part Number 1=AS5047D-ATSMCT-ND, Supplier 1=Digi-Key
U4: Supplier Part Number 1=621-LM4040D33FTA, Supplier 1=Mouser
U5: "SOT-23, 44 V, Over-the-Top, Micropower, Precision Rail-to-Rail Comparator, 1 Channel, 2.7 to 44 V, 0 to +70 degC, 5-pin Plastic TSOT-23 (S5), Mini Tape and Reel", Generic Part Number=LT1716, Manufacturer="Linear Technology", Supplier Part Number 1=LT1716CS5#TRMPBFCT-ND, Supply Current (uA) Typical=50, Supply Voltage Range="2.7 to 44 V", Channels (#)=1, Code_JEDEC=MO-193, ComponentLink1Description="Manufacturer URL", ComponentLink1URL=http://www.linear.com/, ComponentLink2Description=Datasheet, ComponentLink2URL=http://cds.linear.com/docs/en/datasheet/1716fa.pdf, ComponentLink3Description="Package Specification", ComponentLink3URL=http://cds.linear.com/docs/en/packaging/SOT_5_05-08-1635.pdf, DatasheetVersion="Rev A", Features="Comparator, Over-the-Top Inputs, Rail-to-Rail Out", Mounting Technology="Surface Mount", PackageDescription="5-Pin Plastic TSOT-23, Body 2.9 x 1.63 mm, Pitch 0.95 mm", PackageReference=S5, PartNumber=LT1716CS5#TRMPBF, Prop Delay (us)=3, RoHS=Y, Supplier 1=Digi-Key, Vos (mV) Guaranteed=1.6, Vos (mV) Typical=0.3, Vs Max (V)=44, Vs Min (V)=2.7
U6: library part SN74LV1T32DBVR, "Single Power Supply 2-INPUT POSITIVE OR GATE with Logic Level Shifter, DBV0005A, LARGE T&R", F @ Nom Voltage(Max)(Mhz)=50, Generic Part Number=SN74LV1T32, ICC @ Nom Voltage(Max)(mA)=0.01, Manufacturer="Texas Instruments", Operating Temperature Range(C)="-40 to 125", Rating=Catalog, Supplier Part Number 1=296-37201-1-ND, tpd @ Nom Voltage(Max)(ns)=13,7.5,5.5,7.0, Voltage(Nom)(V)=1.8,2.5,3.3,5.5, 3-State Output=Yes, Bits(#)=1, DatasheetVersion=SCLS741A, Input Type=TTL, Logic=True, Output Drive (IOL/IOH)(Max)(mA)=8/-8, Output Type=CMOS, PackageReference=DBV0005A, Schmitt Trigger=No, Special Features="1.8V to 3.3V Up Translation,3.3V to 1.8V Down Translation,5V Input Tolerant", Sub-Family="OR Gate", Supplier 1=Digi-Key, Technology Family=LV1T, VCC(Max)(V)=5.5, VCC(Min)(V)=1.6
Y1: library part ABS05W-32.768KHZ-D-2-T, "Crystal Oscillator", Supplier Part Number 1=535-14310-1-ND, Supplier 1=Digi-Key

## Free pads (board coordinates)
  round 175 hole 118.11: ""(0,-374.02) ""(0,374.02)

## Via types
v1: diameter 15.75, hole 7.87, Top Layer to Bottom Layer, tented both sides, 77 vias
v2: diameter 12, hole 12, Top Layer to Bottom Layer, 45 vias
v3: diameter 24, hole 12, Top Layer to Bottom Layer, tented both sides, 36 vias
v4: diameter 7.87, hole 7.87, Top Layer to Bottom Layer, tented both sides, 16 vias

## Nets (pads, with @x,y where several pads share a name; then routed paths per layer and width w, separated by ;. In a path a pad name is that pad's centre, name@x,y a point inside that pad or via, vN(x,y) a via of type N, cw(c..) or ccw(c..) an arc to the next point about the centre after c; other vN are vias at no path point)
\nCS: U2.38 U3.36 | length 720.8
  Top Layer w8: U3.36@-146.14,-9.84 -132.45,-9.84 cw(c-132.45,-27.45) -120,-15 ccw(c-107.93,-2.93) -107.93,-20 -83.87,-20 v1(-60,-19.96) ; v1(410,170) cw(c401.35,161.35) 413.58,161.35 U2.38@413.58,136.44
  Int2 w8: v1(-60,-19.96) cw(c-60,-68.15) -25.93,-34.07 10,-70 ccw(c58.28,-21.72) 58.28,-90 108.58,-90 ccw(c108.58,10) 179.29,-60.71 v1(410,170)
\nCS1: U1.1 U2.37 | length 449.3
  Top Layer w8: v1(430,195) cw(c422.11,187.11) 433.27,187.11 U2.37@433.27,136.44
  Int2 w8: v1(160,140) 185.71,165.71 cw(c256.42,95) 256.42,195 v1(430,195)
  Bottom Layer w8: U1.1@116.14,76.77 146.77,76.77 ccw(c146.77,90) 160,90 v1(160,140)
\nFAULT: R4.2 U2.31 U3.22 | length 1355.6
  Top Layer w8: v1(-405,-165) cw(c-403.19,-166.81) -403.19,-164.25 -375,-164.25 -375,-142.07 cw(c-357.93,-142.07) -370,-130 ccw(c-373.42,-126.58) -368.58,-126.58 U3.22@-368.58,-94.49 ; U2.31@461.44,9.84 cw(c461.44,-35.35) 478.44,6.52 ccw(c481.41,13.95) 479.36,6.22 cw(c475.22,-9.84) 486.73,2.1 cw(c461.44,-35.35) 493.44,-3.44 500.57,-10.57 cw(c494.93,-16.24) 501.63,-11.88 ccw(c520,0) 508.12,-18.37 cw(c503.76,-25.07) 509.4,-19.4 v1(515,-25)
  Int2 w8: v1(-405,-165) cw(c-405,-225.36) -362.32,-182.68 -359.29,-185.71 ccw(c-288.58,-115) -288.58,-215 -267.07,-215 ccw(c-267.07,-197.93) -255,-210 cw(c-242.93,-222.07) -242.93,-205 -105,-205 cw(c-105,-277.43) -53.79,-226.21 -44.29,-235.71 ccw(c26.42,-165) 26.42,-265 255.86,-265 cw(c255.86,-299.14) 280,-275 ccw(c340.36,-214.64) 340.36,-300 365,-300 ccw(c365,-203.43) 433.28,-271.72 515.71,-189.29 ccw(c445,-118.58) 545,-118.58 545,-80 ccw(c484.64,-80) 527.33,-37.33 v1(515,-25)
\nSLEEP: R14.1 U3.23 | length 72.1
  Top Layer w8: U3.23@-348.9,-94.49 -348.9,-120.59 ccw(c-335.59,-120.59) -345,-130 cw(c-357.07,-142.07) -340,-142.07 R14.1@-340,-164.25
\RESET: SW1.4 U2.40 | length 799.6
  Top Layer w8: SW1.4@101.38,808.46 141.64,808.46 cw(c141.64,796.64) v1(150,805) ; v1(355,260) cw(c308.62,213.62) 374.21,213.62 U2.40@374.21,136.44
  Int2 w8: v1(150,805) 195.71,759.29 cw(c125,688.58) 225,688.58 225,431.42 ccw(c325,431.42) 254.29,360.71 v1(355,260)
A0: U2.3
A4: U2.10
A5: U2.47
AOUT_U: C19.2 R10.2 U2.7 | length 408.8
  Top Layer w8: C19.2@-54.65,150 v1(-30,150) ; R10.2@-54.25,115 C19.2@-54.25,149.05 ; v1(60,-15) 60.41,-15.41 ccw(c66.04,-9.72) 64.43,-17.56 cw(c60,-40) 69.08,-19.01 ccw(c72.21,-11.64) 72.17,-19.64 140.32,-19.64 ccw(c140.32,-1.46) 154.53,-12.8 cw(c160.74,-17.84) 160.7,-9.84 U2.7@188.56,-9.84
  Top Layer w10: C19.2@-54.65,150 cw(c-55.6,149.05) C19.2@-54.25,149.05
  Int2 w8: v1(-30,150) cw(c-30,60) 60,60 v1(60,-15)
AOUT_V: C18.2 R12.2 U2.8 | length 375.1
  Top Layer w8: R12.2@-54.25,80 C18.2@-20.35,80 v1@-20.35,104.65 ; v1(60,-40) 68.96,-40 ccw(c68.96,-32) 74.61,-37.66 76.29,-35.98 cw(c81.94,-41.64) 81.94,-33.64 140.32,-33.64 ccw(c140.32,-1.46) 154.51,-30.34 cw(c158.04,-37.53) 158,-29.53 U2.8@188.56,-29.53
  Top Layer w10: v1@-20.35,104.65 v1(-20,105)
  Int2 w8: v1(-20,105) 14.83,70.17 cw(c-21.8,33.54) 30,33.54 30,-20 ccw(c50,-20) 50,-40 v1(60,-40)
AOUT_W: C17.2 R13.2 U2.9 | length 337.3
  Top Layer w8: R13.2@-54.25,45 C17.2@-20.35,45 ; C17.2@-20,45.35 v1@4.65,45.35 ; v1(60,-65) 60.05,-65 ccw(c60.44,-47.35) 72.93,-59.84 cw(c98.57,-85.48) 98.57,-49.21 U2.9@188.56,-49.21
  Top Layer w10: C17.2@-20.35,45 C17.2@-20,45.35 ; v1@4.65,45.35 v1(5,45)
  Int2 w8: v1(5,45) 5,-18.22 ccw(c51.78,-18.22) 51.78,-65 v1(60,-65)
CP: C11.1 U3.8 | length 119.1
  Top Layer w10: C11.1@-325,209.41 -325,149.14 ccw(c-290.86,149.14) -315,125 cw(c-328.21,111.79) -309.53,111.79 U3.8@-309.53,94.49
CPH: C14.2 U3.7 | length 52.1
  Top Layer w10: C14.2@-295.75,145 cw(c-310.01,130.74) -289.84,130.74 U3.7@-289.84,94.49
CPL: C14.1 U3.6 | length 52.1
  Top Layer w10: U3.6@-270.16,94.49 -270.16,130.74 cw(c-249.99,130.74) C14.1@-264.25,145
D10: U2.27
D12: U2.28
D13: R3.1 U2.26 | length 109.4
  Top Layer w8: U2.26@461.44,-88.58 476.35,-88.58 ccw(c476.35,-76.35) 485,-85 cw(c497.07,-97.07) 497.07,-80 500,-80 cw(c500,-105) 525,-105 R3.1@525,-134.25
D+: J1.A6 J1.B6 R2.2 | length 265.9
  Top Layer w10: R2.2@540.75,65 544.61,61.14 v1(565,45) ; v1(570,-16.25) ccw(c577.54,-9.69) 577.54,-19.69 J1.A6@596.57,-19.68 ; J1.B6@647.76,9.84 675,9.84 v1(675,10)
  Int2 w8: v1(565,45) cw(c552.93,32.93) 570,32.93 570,-20 603.58,-20 ccw(c603.58,80) v1@674.29,9.29
  Int2 w10: v1@674.29,9.29 v1(675,10)
D-: J1.A7 J1.B7 R1.2 | length 133.5
  Top Layer w8: R1.2@540.75,30 545.97,30 cw(c545.93,22) 551.02,28.17 ccw(c565,45) 552.87,26.8 ccw(c565,45) 554.74,25.68 cw(c550.95,18.63) 557.21,23.62 ccw(c565.32,30) 565.32,19.68 J1.A7@596.57,19.68 ; J1.A7@596.64,17.72 596.64,17.78 J1.A7@596.57,19.68 ; J1.B7@647.76,-9.84 647.76,-10 630,-10 cw(c630,0) 620,0 620,10 ccw(c610.32,10) 610.32,19.68 J1.A7@596.57,19.68
DISABLE: U2.25 U6.2 | length 749.2
  Top Layer w8: U6.2@291.06,518.94 309.39,500.61 cw(c283.79,475) 320,475 320,449.14 cw(c285.86,449.14) v1(310,425) ; U2.25@461.44,-108.27 495.81,-108.27 cw(c495.81,-114.19) v1(500,-110)
  Int2 w8: v1(310,425) 310,406.42 ccw(c410,406.42) 339.29,335.71 457.32,217.68 cw(c414.64,175) 475,175 475,-49.64 ccw(c560.36,-49.64) v1(500,-110)
DRV_VREF: C8.2 C9.2 U3.25 U3.37 | length 595.9
  Top Layer w8: U3.25@-309.53,-94.49 -309.53,-141.41 ccw(c-277,-141.41) C8.2@-300,-164.41 cw(c-300,-175.06) C8.2@-292.48,-167.52 ; C8.2@-292.47,-167.53 v1(-275,-185) ; U3.37@-146.14,9.84 -80.97,9.84 cw(c-80.97,-0.49) v1(-73.67,6.82) cw(c-73.67,-45.08) -36.97,-8.39 C9.2@-30.35,-15
  Int2 w8: -295,-150.04 ccw(c-258.79,-150) -284.39,-175.61 v1(-275,-185) ; -295,-150 cw(c-254.2,-150.2) -281.95,-120.29 cw(c-255.56,-148.97) -255.56,-110 -146.21,-110 ccw(c-146.21,-58.79) -110,-95 ccw(c-134.14,-70.86) -100,-70.86 -100,-40 cw(c-50.55,-40) -85.52,-5.03 v1(-73.67,6.82)
DRVOFF: U3.21 U6.4 | length 1333.7
  Top Layer w8: v1(-400,-130) ccw(c-428.32,-101.68) -388.27,-101.68 U3.21@-388.27,-94.49 ; v1(200,655) cw(c200,635.94) 213.48,649.42 U6.4@235.38,627.51
  Int2 w8: v1(-400,-130) -375.64,-105.64 cw(c-350,-131.21) -349.98,-95 -155,-95 ccw(c-155,-60) -120,-60 -120,135 cw(c-20,135) -20,235 69.83,235 ccw(c69.83,365.17) 200,365.17 v1(200,655)
GND: C1.1 C2.1 C3.1 C4.1 C5.1 C6.1 C7.1 C8.1 C9.1 C10.1 C12.1 C13.2 C15.1 C16.1 C17.1 C18.1 C19.1 C20.2 C21.2 C22.1 D1.1 D2.1 J1.A1 J1.A12 J1.B1 J1.B12 P8.1 P9.1 pad. R5.2 R6.2 R17.1 R18.1 SW1.3 U1.5 U1.13 U2.5 U2.18 U2.35 U2.42 U2.49 U3.2 U3.4 U3.12 U3.15 U3.18 U3.26 U3.41 U3.42 U4.2 U5.2 U6.3 | length 2106.9
  Top Layer w8: v1(-345,-350) -345,-350.59 U4.2@-311.34,-350.59 ; v1(-300,-250) C8.1@-300,-215.59 ; C16.1@44.41,55 70.46,28.95 ccw(c80,38.49) 80,25 107.93,25 ccw(c107.93,42.07) 120,30 cw(c132.93,17.07) 132.93,35.35 C2.1@135,35.35 ; SW1.3@101.38,741.54 146.29,741.54 cw(c146.29,736.29) v1(150,740) ; v1(230,-305) cw(c236.08,-311.08) 236.08,-302.48 D2.1@265,-302.48 ; v1(495,-300) 497.48,-300 ccw(c497.48,-272.48) D1.1@525,-272.48 ; v1(625,260) R18.1@625,284.25 ; R17.1@655.75,220 v1(680,220)
  Top Layer w10: U3.18@-413.86,-29.53 -387.28,-29.53 ccw(c-387.28,-24.61) v4(-382.36,-24.61) ; U3.15@-413.86,29.53 -387.28,29.53 cw(c-387.28,24.61) v4(-382.36,24.61) -382.36,68.63 ccw(c-391.37,68.63) -385,75 cw(c-377.11,82.89) -388.27,82.89 U3.12@-388.27,94.49 ; U3.26@-289.84,-94.49 -289.84,-72.83 cw(c-280,-72.83) v4(-280,-62.99) ; U3.41@-280,0 -191.42,67.84 U3.2@-191.42,94.49 ; U3.4@-230.79,94.49 -230.79,72.5 ccw(c-217.34,72.5) v4(-226.85,62.99) ; C17.1@-20,14.65 -8.78,14.65 ccw(c-8.78,49.27) 12.31,21.8 ; v1(0,120) cw(c-25,95) 10.35,95 C18.1@10.35,80 28.95,61.4 ccw(c44.41,76.86) C16.1@44.41,55 36.04,46.54 35.25,45.84 27.8,38.39 ccw(c34.91,31.36) 25.83,35.54 cw(c5,45) 15.71,24.79 cw(c-8.78,49.27) 12.31,21.8 ; C9.1@0.35,-15 0.58,-9.69 cw(c62.99,-15) 12.31,21.8 ; C2.1@135,35.35 ccw(c140.83,35.35) 140.83,29.53 U2.5@188.56,29.53 295.47,29.53 v1(325,0) ; v1(265,250) ccw(c275.65,260.65) 275.65,245.59 C1.1@305,245.59 ; U6.3@317.51,545.38 cw(c317.51,540.3) 321.1,543.9 v1(345,520) ; C3.1@320.35,-190 cw(c332.9,-177.46) 315.16,-177.46 U2.18@315.16,-136.44 315.16,-9.84 v1(325,0) ; U2.42@334.84,136.44 U2.49@334.84,9.84 ; C22.1@385,465.35 391.71,465.35 ccw(c391.71,498.29) v1(415,475) ; v1(505,475) U5.2@538.15,475 ; C4.1@520,94.65 519.65,95 cw(c504.16,110.49) 504.16,88.58 U2.35@461.44,88.58 413.58,88.58 U2.49@334.84,9.84 ; C4.1@520,99.65 cw(c543.19,76.46) 543.19,109.25 R5.2@555,109.25 ; R6.2@560,-120.75 590.21,-120.75 ccw(c590.21,-111.74) J1.A1@596.57,-118.11 ; v1(325,0) U2.49@334.84,9.84
  Bottom Layer w10: v4(-177.64,24.61) -177.64,51.18 U1.13@-116.14,51.18
  Bottom Layer w16: U1.5@116.14,-25.59 222.28,-25.59 cw(c222.28,-57.72) v1(245,-35)
  other v1: 620,-130 245,-80 405,-80 -37.6,19.27 245.43,79.57 405,80 620,130 -145,145 -75,185 65,200
  other v2: -764.13,-416.49 -728.74,-399.23 -693.35,-381.97 -781.38,-381.11 -746,-363.85 -710.61,-346.59 -798.64,-345.72 -763.26,-328.46 -727.87,-311.2
  other v3: -610,-385 -630,-330 -465,-315 -650,-280 -475,-275 -485,-235 -530,-205 -475,-190 -510,-165 -450,130 -485,160 -450,165 -515,175 -360,429.16
  other v4: -333.15,-62.99 -226.85,-62.99 -333.15,-24.61 -280,-24.61 -226.85,-24.61 -177.64,-24.61 -333.15,24.61 -280,24.61 -226.85,24.61 -333.15,62.99 -280,62.99
IN_UH: U2.24 U3.27 | length 874.5
  Top Layer w8: U3.27@-270.16,-94.49 -270.16,-137.55 ccw(c-252.55,-137.55) v1(-265,-150) ; v1(410,-235) ccw(c353.82,-178.82) 433.27,-178.82 U2.24@433.27,-136.44
  Int2 w8: v1(-265,-150) -217.07,-150 cw(c-217.07,-167.07) -205,-155 ccw(c-192.93,-142.93) -192.93,-160 -111.42,-160 cw(c-111.42,-260) -40.71,-189.29 -30,-200 ccw(c30.36,-139.64) 30.36,-225 260,-225 cw(c260,-273.28) 294.14,-239.14 295,-240 ccw(c343.28,-191.72) 343.28,-260 350,-260 ccw(c350,-175.5) 409.75,-235.25 v1(410,-235)
IN_UL: R7.2 U3.28 | length 106.6
  Top Layer w8: U3.28@-250.47,-94.49 -250.47,-124.72 ccw(c-214.72,-124.72) -249.42,-133.33 ccw(c-241.67,-131.34) -247.96,-136.29 cw(c-265,-150) -243.41,-153.53 ccw(c-235.51,-154.78) -243.51,-154.74 -243.51,-194.82 R7.2@-245,-199.25
IN_VH: U2.29 U3.29 | length 1062.9
  Top Layer w8: U3.29@-230.79,-94.49 -230.79,-116.03 ccw(c-211.03,-116.03) -225,-130 cw(c-237.07,-142.07) -220,-142.07 v1(-220,-175) ; U2.29@461.44,-29.53 462.64,-29.53 cw(c462.64,-82.36) v1(500,-45)
  Int2 w8: v1(-220,-175) -121.42,-175 cw(c-121.42,-275) -50.71,-204.29 -39.29,-215.71 ccw(c31.42,-145) 31.42,-245 255.86,-245 cw(c255.86,-279.14) 280,-255 ccw(c340.36,-194.64) 340.36,-280 364.64,-280 ccw(c364.64,-194.64) 425,-255 495.71,-184.29 ccw(c425,-113.58) 525,-113.58 525,-90 ccw(c476.72,-90) 510.86,-55.86 v1(500,-45)